# EAGLE board pannelized_v0_5 (EAGLE 7.2.0), part 1 of 2
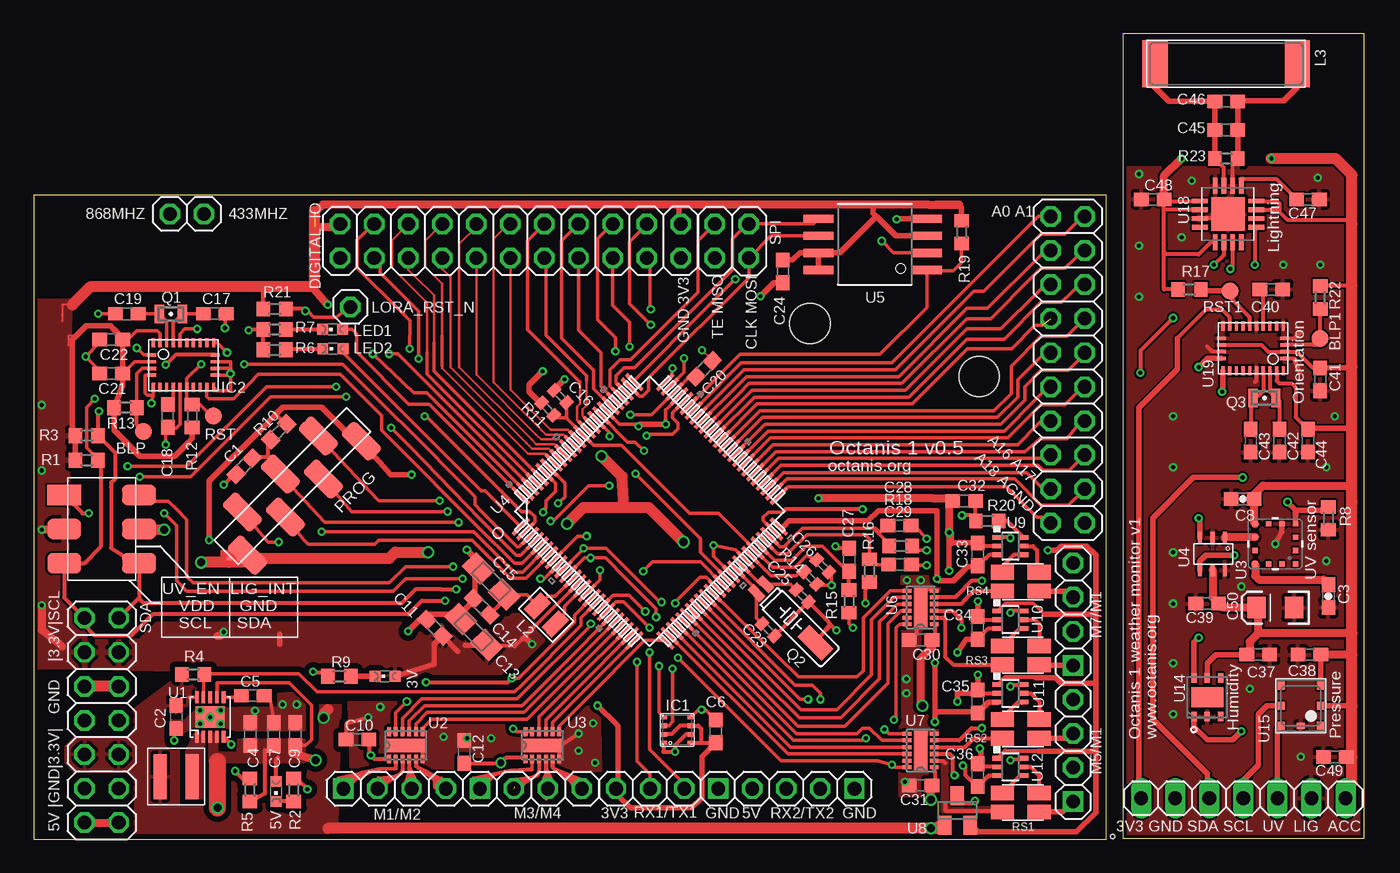
[diagram p0: board, top side]
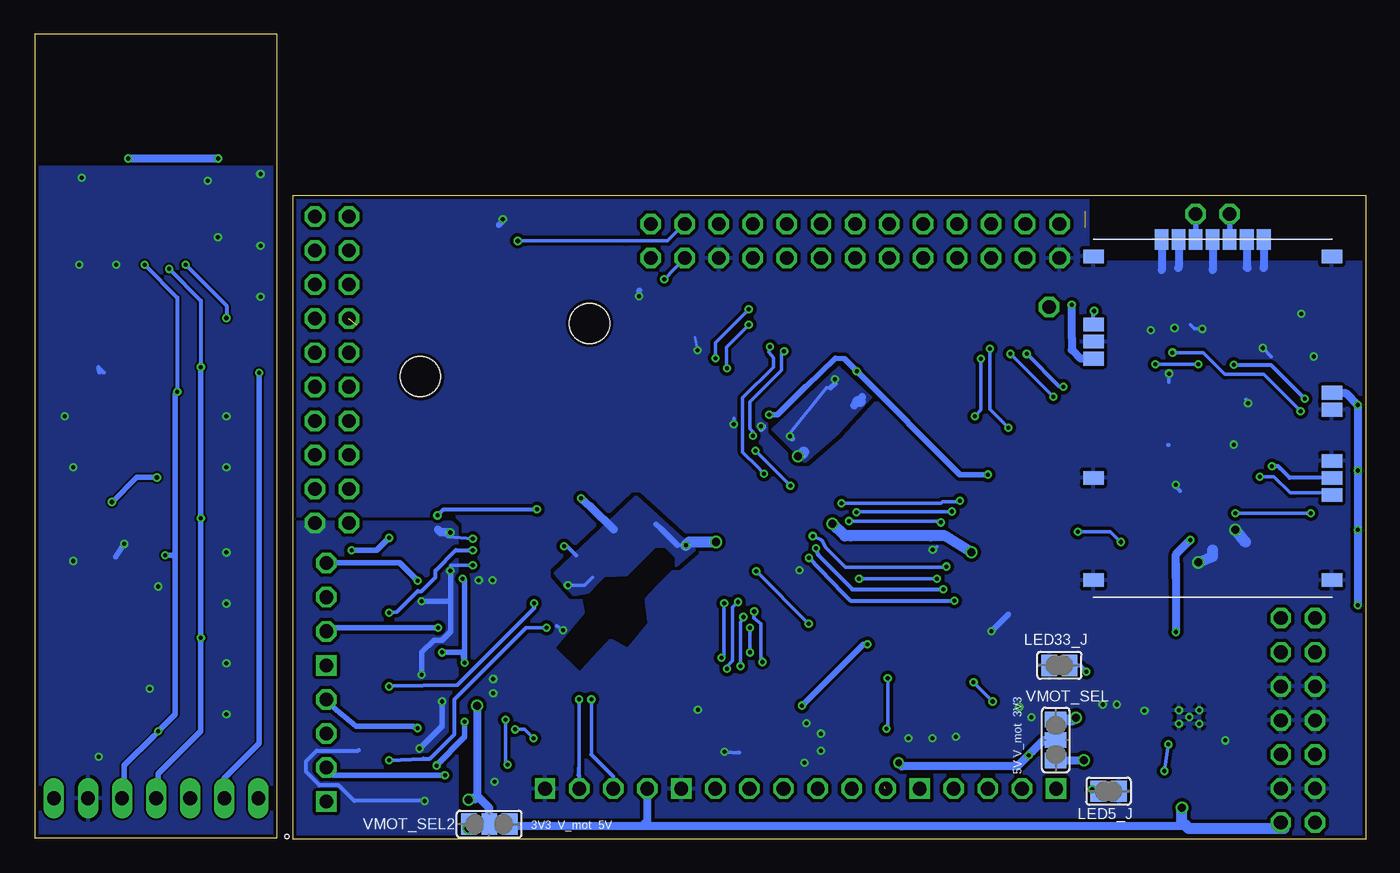
[diagram p1: board, bottom side, seen from below]

Size 99.21 x 60.07 mm. Coordinates in mm from the lower left corner, seen from the top.
Outline: 0,0 80,0 80,48 0,48 0,0
Outline: 99.21,0.07 99.21,60.07 81.21,60.07 81.21,0.07 99.21,0.07
Copper layers (1*16): Top 0.035mm / dielectric 1.5mm / Bottom 0.035mm
Design rules "SeeedStudio_2layer_DRU_no_angle_20140221 *": minimum track width 8mil, minimum drill 12mil, track to track 6mil, track to pad 8mil, pad to pad 6mil, via to via 8mil, smd to smd 0mil, copper to edge 10mil, drill to drill 10mil, minimum pad ring 6mil, minimum via ring 6mil, stop-mask expansion 2mil, vias tented up to drill 100mil, thermal gap 10mil
Net classes: 0 default: width 0.203 mm; 1 power: width 0.203 mm, drill 0.305 mm, clearance 0.152 mm; 2 VIN: width 0.203 mm, drill 0.305 mm, clearance 0.152 mm; 3 fine: width 0.406 mm, drill 0.61 mm, clearance 0.152 mm
Holes 3 mm at 57.9,38.46 70.5,34.5
Holes 0.3 mm at 80.47,0.22

## Footprints (pad centres in the part's own frame; a part is rotated, then mirrored left to right if it is on the bottom)
CHIPLED_0603 = smd 0.8 x 0.8: A 0,-0.75; C 0,0.75
1X01 = drill 1.016 octagon: 1 0,0
2X10 = drill 1.016 octagon: 1 -11.43,-1.27; 2 -11.43,1.27; 3 -8.89,-1.27; 4 -8.89,1.27; 5 -6.35,-1.27; 6 -6.35,1.27; 7 -3.81,-1.27; 8 -3.81,1.27; 9 -1.27,-1.27; 10 -1.27,1.27; 11 1.27,-1.27; 12 1.27,1.27; 13 3.81,-1.27; 14 3.81,1.27; 15 6.35,-1.27; 16 6.35,1.27; 17 8.89,-1.27; 18 8.89,1.27; 19 11.43,-1.27; 20 11.43,1.27
B1,27 = smd 1.27 x 1.27: TP 0,0
C0603 = smd 1.1 x 1: 1 -0.85,0; 2 0.85,0
0603-CAP = smd 1.1 x 1: 1 -0.85,0; 2 0.85,0
A/3216-18R = smd 1.95 x 1.5: + 1.375,0; - -1.375,0
C0402 = smd 0.7 x 0.9: 1 -0.65,0; 2 0.65,0
EIA3216 = smd 1.4 x 1.6: A 1.4,0; C -1.4,0
2X11 = drill 1.016 octagon: 1 -12.7,-1.27; 2 -12.7,1.27; 3 -10.16,-1.27; 4 -10.16,1.27; 5 -7.62,-1.27; 6 -7.62,1.27; 7 -5.08,-1.27; 8 -5.08,1.27; 9 -2.54,-1.27; 10 -2.54,1.27; 11 0,-1.27; 12 0,1.27; 13 2.54,-1.27; 14 2.54,1.27; 15 5.08,-1.27; 16 5.08,1.27; 17 7.62,-1.27; 18 7.62,1.27; 19 10.16,-1.27; 20 10.16,1.27; 21 12.7,-1.27; 22 12.7,1.27
BME280 = smd 0.35 x 0.5: 1 0.975,-1.025; 2 0.325,-1.025; 3 -0.325,-1.025; 4 -0.975,-1.025; 5 -0.975,1.025; 6 -0.325,1.025; 7 0.325,1.025; 8 0.975,1.025
BNO055 = smd 0.675 x 0.25: 1 1.663,2.25; 6 -1.665,2.25; 7 -1.665,1.75; 8 -1.665,1.25; 9 -1.665,0.75; 10 -1.665,0.25; 11 -1.665,-0.25; 12 -1.665,-0.75; 13 -1.665,-1.25; 14 -1.665,-1.75; 15 -1.665,-2.25; 20 1.663,-2.25; 21 1.663,-1.75; 22 1.663,-1.25; 23 1.663,-0.75; 24 1.663,-0.25; 25 1.663,0.25; 26 1.663,0.75; 27 1.663,1.25; 28 1.663,1.75 | smd 0.25 x 0.675: 2 0.75,2.362; 3 0.25,2.362; 4 -0.25,2.362; 5 -0.75,2.362; 16 -0.75,-2.362; 17 -0.25,-2.362; 18 0.25,-2.362; 19 0.75,-2.362
H2X3-SMD-2.54 = smd 2.54 x 1.524: 1 -2.794,2.54; 2 -2.794,0; 3 -2.794,-2.54; 4 2.794,-2.54; 5 2.794,0; 6 2.794,2.54
1X07 = drill 1.016 long: 1 -7.62,0; 2 -5.08,0; 3 -2.54,0; 4 0,0; 5 2.54,0; 6 5.08,0; 7 7.62,0
2X07 = drill 1.016 octagon: 1 -7.62,-1.27; 2 -7.62,1.27; 3 -5.08,-1.27; 4 -5.08,1.27; 5 -2.54,-1.27; 6 -2.54,1.27; 7 0,-1.27; 8 0,1.27; 9 2.54,-1.27; 10 2.54,1.27; 11 5.08,-1.27; 12 5.08,1.27; 13 7.62,-1.27; 14 7.62,1.27
XFL4020 = smd 0.965 x 3.353: P$1 -1.181,0; P$2 1.181,0
0806 = smd 1.1 x 1.8: 1 -0.94,0; 2 0.94,0
COILCRAFT = smd 1.9 x 3.5: 1 -5.3,0.05; 2 5.3,0.05
SJ = smd 1.168 x 1.6: 1 -0.762,0; 2 0.762,0
1X04-S = drill 1.016 square: 1 -3.81,0 | drill 1.016 octagon: 2 -1.27,0; 3 1.27,0; 4 3.81,0
1X7SMD = smd 3.048 x 1.524: 1 -1.27,6; 2 1.27,4; 3 -1.27,2; 4 1.27,0; 5 -1.27,-2; 6 1.27,-4; 7 -1.27,-6
FC-12M = smd 0.7 x 1.4: 1 -0.85,0; 2 0.85,0
MS3V-T1R = smd 0.635 x 1.27: P1 -0.47,-4.43; P2 0.47,-4.43 | smd 1.27 x 2.54: P3 0,1.3
R0603 = smd 1 x 1.1: 1 -0.85,0; 2 0.85,0
R0402 = smd 0.7 x 0.9: 1 -0.65,0; 2 0.65,0
4PADS_RESISTOR = smd 1.727 x 1.1: I1 0,0; I2 2.751,0; V1 0,1.4; V2 2.751,1.4
2X02 = drill 1.016 octagon: 1 -1.27,-1.27; 2 -1.27,1.27; 3 1.27,-1.27; 4 1.27,1.27
S-PVSON-N10 = smd 0.28 x 0.825: 1 -1,-1.462; 2 -0.5,-1.462; 3 0,-1.462; 4 0.5,-1.462; 5 1,-1.462; 6 1,1.462; 7 0.5,1.462; 8 0,1.462; 9 -0.5,1.462; 10 -1,1.462 | smd 2.15 x 1.6: EXPAD 0,0 | drill 0.3 pad 0.605: GND1 -0.762,0.508 | drill 0.3 pad 0.61: GND2 -0.762,-0.508; GND3 0,0; GND4 0.762,-0.508 | drill 0.305 pad 0.605: GND5 0.762,0.508
SON50P200X300X80-13N = smd 0.66 x 0.305: 1 -1.016,1.245; 2 -1.016,0.762; 3 -1.016,0.254; 4 -1.016,-0.254; 5 -1.016,-0.762; 6 -1.016,-1.245; 7 1.016,-1.245; 8 1.016,-0.762; 9 1.016,-0.254; 10 1.016,0.254; 11 1.016,0.762; 12 1.016,1.245 | smd 0.991 x 3.099: 13 0,0
PZ100 = smd 1.676 x 0.279: 1 -7.62,5.994; 2 -7.62,5.512; 3 -7.62,5.004; 4 -7.62,4.496; 5 -7.62,3.988; 6 -7.62,3.505; 7 -7.62,2.997; 8 -7.62,2.489; 9 -7.62,2.007; 10 -7.62,1.499; 11 -7.62,0.991; 12 -7.62,0.508; 13 -7.62,0; 14 -7.62,-0.508; 15 -7.62,-0.991; 16 -7.62,-1.499; 17 -7.62,-2.007; 18 -7.62,-2.489; 19 -7.62,-2.997; 20 -7.62,-3.505; 21 -7.62,-3.988; 22 -7.62,-4.496; 23 -7.62,-5.004; 24 -7.62,-5.512; 25 -7.62,-5.994; 51 7.62,-5.994; 52 7.62,-5.512; 53 7.62,-5.004; 54 7.62,-4.496; 55 7.62,-3.988; 56 7.62,-3.505; 57 7.62,-2.997; 58 7.62,-2.489; 59 7.62,-2.007; 60 7.62,-1.499; 61 7.62,-0.991; 62 7.62,-0.508; 63 7.62,0; 64 7.62,0.508; 65 7.62,0.991; 66 7.62,1.499; 67 7.62,2.007; 68 7.62,2.489; 69 7.62,2.997; 70 7.62,3.505; 71 7.62,3.988; 72 7.62,4.496; 73 7.62,5.004; 74 7.62,5.512; 75 7.62,5.994 | smd 0.279 x 1.676: 26 -5.994,-7.62; 27 -5.512,-7.62; 28 -5.004,-7.62; 29 -4.496,-7.62; 30 -3.988,-7.62; 31 -3.505,-7.62; 32 -2.997,-7.62; 33 -2.489,-7.62; 34 -2.007,-7.62; 35 -1.499,-7.62; 36 -0.991,-7.62; 37 -0.508,-7.62; 38 0,-7.62; 39 0.508,-7.62; 40 0.991,-7.62; 41 1.499,-7.62; 42 2.007,-7.62; 43 2.489,-7.62; 44 2.997,-7.62; 45 3.505,-7.62; 46 3.988,-7.62; 47 4.496,-7.62; 48 5.004,-7.62; 49 5.512,-7.62; 50 5.994,-7.62; 76 5.994,7.62; 77 5.512,7.62; 78 5.004,7.62; 79 4.496,7.62; 80 3.988,7.62; 81 3.505,7.62; 82 2.997,7.62; 83 2.489,7.62; 84 2.007,7.62; 85 1.499,7.62; 86 0.991,7.62; 87 0.508,7.62; 88 0,7.62; 89 -0.508,7.62; 90 -0.991,7.62; 91 -1.499,7.62; 92 -2.007,7.62; 93 -2.489,7.62; 94 -2.997,7.62; 95 -3.505,7.62; 96 -3.988,7.62; 97 -4.496,7.62; 98 -5.004,7.62; 99 -5.512,7.62; 100 -5.994,7.62
SOIC_8-LEAD = smd 0.61 x 2.21: CE -1.905,-2.934; RST/HOLD -0.635,5.156; SCK 0.635,5.156; SI 1.905,5.156; SO -0.635,-2.934; VDD -1.905,5.156; VSS 1.905,-2.934; WP 0.635,-2.934
MAX6001 = smd 1 x 1.4: 1 -0.95,-1.1; 2 0.95,-1.1; 3 0,1.1
SC70-6 = smd 0.35 x 0.8: 1 -0.65,-0.95; 2 0,-0.95; 3 0.65,-0.95; 4 0.65,0.95; 5 0,0.95; 6 -0.65,0.95
RN2483 = smd 1.524 x 1.016: P$1 17.78,1.27; P$6 17.78,7.62; P$7 17.78,8.89; P$8 17.78,10.16; P$11 17.78,13.97; P$12 17.78,15.24; P$20 17.78,25.4; P$28 0,25.4; P$32 0,20.32; P$33 0,19.05; P$34 0,17.78; P$41 0,8.89; P$47 0,1.27 | smd 1.016 x 1.524: P$21 12.7,26.67; P$22 11.43,26.67; P$23 10.16,26.67; P$24 8.89,26.67; P$25 7.62,26.67; P$26 6.35,26.67; P$27 5.08,26.67
DFN300X300X110-7N = smd 0.711 x 0.406: 1 -1.448,0.991; 2 -1.448,0; 3 -1.448,-0.991; 4 1.448,-0.991; 5 1.448,0; 6 1.448,0.991 | smd 1.499 x 2.388: 7 0,0
BMP180 = smd 0.6 x 0.5: 1 1.5,1.45; 2 0,1.45; 3 -1.5,1.45; 4 -1.5,-1.45; 5 0,-1.45; 6 1.5,-1.45 | smd 0.5 x 0.6: 7 1.5,0
SOT-23-6 = smd 0.305 x 0.9: SCL 2.45,-0.45; SDA 2.45,1.95; VDD 1.5,1.95; VIN+ 0.6,-0.45; VIN- 0.6,1.95; VSS 1.5,-0.45
ML8511 = smd 0.4 x 0.4: 1 1.5,-1.5; 2 1.5,-0.5; 3 1.5,0.5; 4 1.5,1.5; 5 0.5,1.5; 6 -0.5,1.5; 7 -1.5,1.5; 8 -1.5,0.5; 9 -1.5,-0.5; 10 -1.5,-1.5; 11 -0.5,-1.5; 12 0.5,-1.5
16LDMLPQ = smd 1.2 x 0.35: 1 -2.1,0.975; 2 -2.1,0.325; 3 -2.1,-0.325; 4 -2.1,-0.975; 9 2.1,-0.975; 10 2.1,-0.325; 11 2.1,0.325; 12 2.1,0.975 | smd 0.35 x 1.2: 5 -0.975,-2.1; 6 -0.325,-2.1; 7 0.325,-2.1; 8 0.975,-2.1; 13 0.975,2.1; 14 0.325,2.1; 15 -0.325,2.1; 16 -0.975,2.1 | smd 2.5 x 2.5: EXP 0,0
STAR = smd 0.152 x 0.305: AGND 0.635,-0.635; DGND 0.635,0.635 | smd 0.305 x 0.152: GND 0.635,0
SJ_2 = smd 1.168 x 1.6: 1 -1.524,0; 2 0,0; 3 1.524,0

## Placement (x,y rotation side)
3V  3V-ok  [CHIPLED_0603]  26.21,12.16 90 top
5V  5V-ok  [CHIPLED_0603]  18.08,3.57 180 top
433MHZ  [1X01]  12.7,46.62 0 top
868MHZ  [1X01]  10.16,46.62 0 top
ANALOG  [2X10]  77.11,35 270 top
BLP  PTR1B1,27  [B1,27]  8.21,30.4 180 top
BLP1  PTR1B1,27  [B1,27]  95.95,37.34 90 top
C1  1n  [C0603]  15.7,27.8 45 top
C2  22uF  [C0603]  10.64,9.12 270 top
C3  1n  [0603-CAP]  96.55,18.14 270 top
C4  22uF  [C0603]  16.17,7.85 90 top
C5  10nF  [C0603]  16.35,10.71 0 top
C6  100n  [C0603]  50.86,8.05 90 top
C7  22uF  [C0603]  17.93,7.85 90 top
C8  100n  [0603-CAP]  90.15,25.37 180 top
C9  3 x 22uF  [C0603]  19.53,7.85 90 top
C10  470n  [C0603]  24.16,7.44 0 top
C11  100n  [C0603]  29.9,15.77 315 top
C12  470n  [C0603]  32.13,6.52 270 top
C13  10u  [A/3216-18R]  32.82,15.46 315 top
C14  100n  [C0603]  33.4,17.34 315 top
C15  10u  [A/3216-18R]  34.11,19.22 315 top
C16  100n  [C0402]  39.28,33.03 135 top
C17  12p  [C0603]  13.51,39.18 0 top
C18  100n  [C0603]  10.01,31.56 90 top
C19  12p  [C0603]  6.96,39.18 180 top
C20  100n  [C0603]  50.01,35.09 225 top
C21  100n  [C0603]  5.79,34.72 180 top
C22  120n  [C0603]  5.79,37.26 180 top
C23  12p  [C0402]  54.79,15.62 135 top
C24  100n  [C0603]  55.88,42.34 270 top
C25  12p  [C0402]  57.33,18.16 135 top
C26  100n  [C0402]  58.86,20.37 315 top
C27  470n  [C0603]  60.81,20.84 270 top
C28  470n  [C0603]  64.57,23.38 180 top
C29  470n  [C0603]  64.62,20.49 180 top
C30  470n  [C0603]  66.14,14.85 0 top
C31  470n  [C0603]  66.14,4.03 0 top
C32  470n  [C0603]  69.39,25.21 0 top
C33  10n  [C0603]  70.41,21.25 270 top
C34  10n  [C0603]  70.41,15.76 270 top
C35  10n  [C0603]  70.41,10.28 270 top
C36  10n  [C0603]  70.41,4.79 270 top
C37  100n  [C0603]  91.32,13.77 0 top
C38  100n  [C0603]  95.13,13.77 180 top
C39  100n  [C0603]  87.51,17.58 180 top
C40  100n  [C0603]  92.29,41 180 top
C41  100n  [C0603]  95.95,34.29 270 top
C42  12p  [C0603]  92.9,29.72 270 top
C43  12p  [C0603]  90.76,29.72 270 top
C44  120n  [C0603]  95.03,29.72 270 top
C45  670p  [C0603]  88.93,52.88 0 top
C46  270p  [C0603]  88.93,55.02 0 top
C47  10u  [C0603]  95.03,47.7 180 top
C48  1u  [C0603]  83.45,47.7 0 top
C49  100n  [C0603]  97.04,6.15 180 top
C50  10uF  [EIA3216]  92.59,17.27 180 top
DIGITAL_IO  [2X11]  35.56,44.61 180 top
IC1  BME280  [BME280]  47.99,8.15 270 top
IC2  BNO055A  [BNO055]  11.18,35.36 90 top
J1  [H2X3-SMD-2.54]  5.08,23.13 0 top
JP1  [1X07]  90.21,3.07 180 top
JP2  [2X07]  5.08,8.87 270 top
L1  1uH  [XFL4020]  10.64,4.67 0 top
L2  4.7uH  [0806]  38.23,16.73 315 top
L3  100uH  [COILCRAFT]  88.93,57.76 0 top
LED1  LED0  [CHIPLED_0603]  22.3,38.02 90 top
LED2  LED1  [CHIPLED_0603]  22.33,36.57 90 top
LED5_J  [SJ]  19.19,3.59 180 bottom
LED33_J  [SJ]  22.86,12.97 0 bottom
LORA_RST_N  [1X01]  23.62,39.69 0 top
M1/M2  [1X04-S]  26.92,3.78 0 top
M3/M4  [1X04-S]  37.08,3.78 0 top
M5/M1  [1X04-S]  77.52,6.62 90 top
M7/M1  [1X04-S]  77.52,16.78 90 top
PROG  [1X7SMD]  19.3,26.33 135 top
Q1  32.768kHz  [FC-12M]  10.24,39.17 180 top
Q2  32.768kHz  [MS3V-T1R]  57.38,15.57 225 top
Q3  32.768kHz  [FC-12M]  91.78,32.9 0 top
R1  4.7k  [R0603]  3.96,28.26 180 top
R2  1k  [R0603]  19.41,3.67 270 top
R3  4.7k  [R0603]  3.96,30.09 180 top
R4  1M  [R0603]  11.91,12.29 180 top
R5  1M  [R0603]  16.14,3.68 270 top
R6  1k  [R0603]  17.98,36.49 0 top
R7  1k  [R0603]  17.98,38.01 0 top
R8  10k  [R0603]  96.55,23.93 270 top
R9  1k  [R0603]  22.81,12.16 0 top
R10  47k  [R0603]  18.29,30.39 225 top
R11  0R  [R0402]  38.33,32.08 135 top
R12  100k  [R0603]  11.84,31.56 90 top
R13  100k  [R0603]  6.86,32.18 180 top
R14  91k 0.1% ±25 ppm/°C  [R0402]  57.94,19.48 315 top
R15  6.8k  [R0603]  60.81,17.75 270 top
R16  6.8k  [R0603]  62.33,20.03 270 top
R17  10k  [R0603]  86.19,41 0 top
R18  6.8k  [R0603]  64.67,21.86 0 top
R19  10k  [R0603]  69.21,45.26 90 top
R20  6.8k  [R0603]  71.12,23.74 0 top
R21  100k  [R0603]  17.98,39.54 180 top
R22  10k  [R0603]  95.95,40.39 90 top
R23  10k  [R0603]  88.93,50.75 180 top
RS1  RS4  [4PADS_RESISTOR]  72.24,18.51 0 top
RS2  RS3  [4PADS_RESISTOR]  72.24,13.02 0 top
RS3  RS2  [4PADS_RESISTOR]  72.24,7.53 0 top
RS4  RS1  [4PADS_RESISTOR]  72.24,2.05 0 top
RST  PTR1B1,27  [B1,27]  13.41,31.57 180 top
RST1  PTR1B1,27  [B1,27]  89.22,40.88 90 top
RX1/TX1  [1X04-S]  47.24,3.78 180 top
RX2/TX2  [1X04-S]  57.4,3.78 180 top
SPI  [2X02]  52.07,44.61 0 top
U1  TPS61232  [S-PVSON-N10]  13.18,9.12 0 top
U2  DRV8836DSSR  [SON50P200X300X80-13N]  27.76,7.01 90 top
U3  DRV8836DSSR  [SON50P200X300X80-13N]  37.95,7.01 90 top
U4  MSP432  [PZ100]  45.95,24.45 45 top
U5  SST25VF064C  [SOIC_8-LEAD]  63.68,44.35 90 top
U6  DRV8836DSSR  [SON50P200X300X80-13N]  66.14,17.29 180 top
U7  DRV8836DSSR  [SON50P200X300X80-13N]  66.14,6.62 180 top
U8  MAX6001SOT-23  [MAX6001]  68.88,2.15 0 top
U9  INA210  [SC70-6]  72.85,21.86 270 top
U10  INA210  [SC70-6]  72.85,16.37 270 top
U11  INA210  [SC70-6]  72.85,10.89 270 top
U12  INA210  [SC70-6]  72.85,5.4 270 top
U13  RN2483  [RN2483]  20.32,18.05 0 bottom
U14  SHT21  [DFN300X300X110-7N]  87.51,10.59 90 top
U15  BMP180  [BMP180]  94.5,9.96 270 top
U16  MCP3425  [SOT-23-6]  89.42,22.02 180 top
U17  ML8511-UV-SENSORSMD  [ML8511]  92.59,22.02 0 top
U18  AS3935  [16LDMLPQ]  89.08,46.61 270 top
U19  BNO055A  [BNO055]  90.94,36.6 270 top
U$1  WEATHER_STRIP_DOCU  [WEATHER_STRIP_DOCU]  14.63,16.98 0 top
U$100  STARGND  [STAR]  15.21,21.55 270 top
VMOT_SEL  3V3 V_Motor 5V  [SJ_2]  23.14,7.41 270 bottom
VMOT_SEL2  3V3 V_Motor 5V  [SJ_2]  65.38,1.13 0 bottom

## Library data of the parts
3V 5V LED1 LED2 = adafruit
433MHZ 868MHZ LORA_RST_N PROG = Headerlibrary
ANALOG DIGITAL_IO JP1 JP2 SPI = pinhead
BLP BLP1 RST RST1 = testpad
C1 C2 C4-C7 C9-C49 R1-R7 R9-R22 = rcl
C3 = SparkFun-Capacitors; PROD_ID: CAP-07886
C8 = SparkFun-Capacitors; PROD_ID: CAP-00810
C50 = SparkFun-Retired; PROD_ID: CAP-00811
IC1 = bosch-bme280
IC2 U19 = BNO055
J1 = Seeed-OPL-Connector; MPN: F185-1203A1BMYA1
L1 = Coilcraft; URL: http://www.coilcraft.com/xfl4020.cfm
L2 = Murata
L3 U18 = AS3935
LED5_J LED33_J VMOT_SEL VMOT_SEL2 = jumper
M1/M2 M3/M4 M5/M1 M7/M1 RX1/TX1 RX2/TX2 = pinhead-2
Q1 Q3 = crystal; URL: http://www.mouser.ch/ProductDetail/ECS/ECS-327-125-12-TR/?qs=sGAEpiMZZMsBj6bBr9Q9adKxTNdvE4KvM1b8HDkgjuY%3d
Q2 = microcrystal
R8 R23 = resistor
RS1-RS4 U9-U12 = Octanis1_EPS
U1 = texasinstruments
U2 U3 U6 U7 = DRV8834; MPN: DRV8836DSSR; OC_FARNELL: 2115236; OC_NEWARK: 94T6066; PACKAGE: SON-12; SUPPLIER: TEXAS INSTRUMENTS
U4 = MSP-EXP432
U5 = BertaLib
U8 U13 U$1 = Octanis1
U14 = SENSIRION-SHT21; MPN: SHT21; OC_FARNELL: 1855468; OC_NEWARK: 20T1172; PACKAGE: DFN-6; SUPPLIER: SENSIRION
U15 = SparkFun-Sensors
U16 = phMeter
U17 = SparkFun-Sensors; PROD_ID: IC-11927
U$100 = lpatiny

## Nets
3V3_MODULE2 [power]: C2.1 JP2.9 JP2.10 L1.P$1 R4.2 U1.10 U8.1 VMOT_SEL2.1 VMOT_SEL.1
5VEN: R4.1 U1.9 U4.17
+3V1 [power]: C8.1 C37.1 C38.1 C39.1 C41.1 C44.1 C48.2 C49.1 C50.A JP1.1 R17.1 R22.2 U14.5 U15.2 U15.3 U16.VDD U17.7 U18.5 U18.6 U18.9 U18.15 U18.16 U19.3 U19.17 U19.28
+3V3 [power]: 3V.A C6.1 C11.2 C13.+ C20.2 C21.1 C22.1 C24.1 DIGITAL_IO.1 DIGITAL_IO.21 IC1.2 IC1.6 IC1.8 IC2.3 IC2.28 J1.2 JP2.3 JP2.4 PROG.7 R1.2 R3.2 R10.1 R11.2 R12.1 R13.2 R19.2 R21.2 RX1/TX1.4 U4.13 U4.73 U5.RST/HOLD U5.VDD U5.WP U13.P$12 U13.P$34
+5V [fine]: 5V.A C4.1 C7.1 C9.1 JP2.13 JP2.14 R5.2 RX2/TX2.4 U1.3 U1.4 U1.7 VMOT_SEL2.3 VMOT_SEL.3
A0: ANALOG.1 U4.69
A1: ANALOG.2 U4.68
A2: ANALOG.3 U4.67
A3: ANALOG.4 U4.66
A4: ANALOG.5 U4.65
A5: ANALOG.6 U4.64
A6: ANALOG.7 U4.63
A7: ANALOG.8 U4.62
A8: ANALOG.9 U4.61
A9: ANALOG.10 U4.60
A10: ANALOG.11 U4.59
A11: ANALOG.12 U4.58
A12: ANALOG.13 U4.57
A13: ANALOG.14 U4.56
A14: ANALOG.15 U4.55
A15: ANALOG.16 U4.54
A16: ANALOG.17 U4.53
A17: ANALOG.18 U4.52
A18: ANALOG.19 U4.51
A20: C32.2 R20.1 U4.49
A20UNF: R20.2 U9.6
A21: C28.2 R18.1 U4.48
A21UNF: R18.2 U10.6
A22: C29.2 R16.1 U4.47
A22UNF: R16.2 U11.6
A23: C27.2 R15.1 U4.46
A23UNF: R15.2 U12.6
ACCEL_INT: IC2.14 U4.5
ACCEL_IRQ: JP1.7 U19.14
ACCEL_N_BOOTLD: BLP.TP IC2.4 R13.1
ACCEL_N_BOOTLD1: BLP1.TP R22.1 U19.4
ACCEL_N_RST: IC2.11 R12.2 RST.TP U4.3
ACCEL_N_RST1: R17.2 RST1.TP U19.11
AGND [power]: ANALOG.20 C16.2 C26.2 C27.1 C28.1 C29.1 C32.1 C33.1 C34.1 C35.1 C36.1 R14.2 U4.40 U4.43 U4.84 U8.3 U9.2 U10.2 U11.2 U12.2 U$100.AGND
ANT433: 433MHZ.1 U13.P$25
ANT868: 868MHZ.1 U13.P$23
AVCC [VIN]: C16.1 C26.1 R11.1 U4.45 U4.87
CURR_SENSE_EN [VIN]: C33.2 C34.2 C35.2 C36.2 U4.50 U9.3 U10.3 U11.3 U12.3
EXT_LIGHTNING_INT: J1.6 U4.8
EXT_UV_EN: J1.1 U4.9
GND [power]: C1.1 C2.2 C4.2 C5.2 C6.2 C7.2 C9.2 C10.1 C11.1 C12.1 C13.- C14.1 C15.- C17.2 C18.1 C19.2 C20.1 C21.2 C22.2 C23.1 C24.2 C25.1 C30.1 C31.1 DIGITAL_IO.2 DIGITAL_IO.22 IC1.1 IC1.5 IC1.7 IC2.2 IC2.5 IC2.6 IC2.10 IC2.15 IC2.16 IC2.17 IC2.18 IC2.25 J1.5 JP2.5 JP2.6 JP2.7 JP2.8 JP2.11 JP2.12 LED5_J.1 LED33_J.1 PROG.1 Q2.P3 R6.1 R7.1 RX1/TX1.1 RX2/TX2.1 U1.EXPAD U1.GND1 U1.GND2 U1.GND3 U1.GND4 U1.GND5 U2.6 U2.13 U3.6 U3.13 U4.15 U4.72 U4.82 U5.VSS U6.6 U6.13 U7.6 U7.13 U13.P$1 U13.P$8 U13.P$11 U13.P$20 U13.P$21 U13.P$22 U13.P$24 U13.P$26 U13.P$27 U13.P$28 U13.P$33 U13.P$41 U13.P$47 U$100.DGND U$100.GND
GND1: C3.2 C8.2 C37.2 C38.2 C39.2 C40.1 C41.2 C42.2 C43.2 C44.2 C45.2 C46.2 C47.1 C48.1 C49.2 C50.C JP1.2 L3.2 R8.2 R23.1 U14.2 U15.7 U16.VIN- U16.VSS U17.5 U18.2 U18.4 U18.7 U18.EXP U19.2 U19.5 U19.6 U19.10 U19.15 U19.16 U19.18 U19.25
IND: L1.P$2 U1.1 U1.2
LED0: LED1.A U4.100
LED1: LED2.A U4.1
LIGHTNING_IRQ: JP1.6 U18.10
LORA_RST_N: LORA_RST_N.1 R21.1 U13.P$32
M1IN1: U2.10 U4.38
M1IN2: U2.9 U4.20
M2IN1: U2.8 U4.21
M2IN2: U2.7 U4.22
M3IN1: U3.10 U4.23
M3IN2: U3.9 U4.24
M4IN1: U3.8 U4.25
M4IN2: U3.7 U4.26
M5IN1: U4.27 U7.10
M5IN2: U4.28 U7.9
M5OUT1: RS4.I1 U7.2
M6IN1: U4.30 U7.8
M6IN2: U4.29 U7.7
M7IN1: U4.31 U6.10
M7IN2: U4.32 U6.9
M8IN1: U4.33 U6.8
M8IN2: U4.36 U6.7
M1234SLEEP: U2.11 U2.12 U3.11 U3.12 U4.16
M5678SLEEP: U4.37 U6.11 U6.12 U7.11 U7.12
N$1: C14.2 C15.+ L2.1 U4.12
N$2: R5.1 U1.5
N$4: 3V.C R9.2
N$5: LED1.C R7.2
N$6: LED2.C R6.2
N$8: C23.2 Q2.P2 U4.41
N$10: C25.2 Q2.P1 U4.42
N$13: M3/M4.1 U3.2
N$14: LED5_J.2 R2.1
N$15: RS4.V2 U12.5
N$17: RS4.V1 U12.4
N$18: C18.2 IC2.9
N$19: C19.1 IC2.27 Q1.2
N$20: C3.1 U17.10
N$21: M5/M1.1 RS4.I2
N$22: U16.VIN+ U17.8
N$23: RS3.V1 U11.4
N$24: RS3.V2 U11.5
N$25: RS3.I1 U7.4
N$26: LED33_J.2 R9.1
N$27: M5/M1.3 RS3.I2
N$28: RS2.V2 U10.5
N$29: RS2.V1 U10.4
N$30: RS1.V2 U9.5
N$31: RS1.V1 U9.4
N$32: M7/M1.1 RS2.I2
N$33: R14.1 U4.44
N$34: L2.2 U4.14
N$35: RS1.I1 U6.4
N$36: RS2.I1 U6.2
N$37: M7/M1.3 RS1.I2
N$38: M5/M1.2 U7.3
N$39: M3/M4.2 U3.3
N$40: M3/M4.3 U3.4
N$41: M3/M4.4 U3.5
N$42: C5.1 U1.6
N$43: M5/M1.4 U7.5
N$44: 5V.C R2.2
N$45: M7/M1.4 U6.5
N$46: C45.1 C46.1 L3.1 R23.2 U18.3
N$47: C47.2 U18.1
N$48: C40.2 U19.9
N$49: M1/M2.1 U2.2
N$50: M1/M2.2 U2.3
N$51: M1/M2.3 U2.4
N$52: M1/M2.4 U2.5
N$53: C43.1 Q3.1 U19.26
N$54: M7/M1.2 U6.3
N$55: C42.1 Q3.2 U19.27
N$73: C17.1 IC2.26 Q1.1
N$76: PROG.6 U4.94
N$77: PROG.5 U4.95
P1.0: DIGITAL_IO.19 U4.4
P3.7: DIGITAL_IO.6 U4.39
P5.7 [power]: DIGITAL_IO.5 U4.71
P6.6: DIGITAL_IO.8 U4.80
P6.7: DIGITAL_IO.7 U4.81
P7.0: DIGITAL_IO.12 U4.88
P7.1: DIGITAL_IO.11 U4.89
P7.2: DIGITAL_IO.14 U4.90
P7.3: DIGITAL_IO.13 U4.91
P9.2: DIGITAL_IO.4 U4.74
P9.3: DIGITAL_IO.3 U4.75
P9.4: DIGITAL_IO.18 U4.96
P9.5: DIGITAL_IO.17 U4.97
P10.2: DIGITAL_IO.20 U4.2
PJ.2: DIGITAL_IO.10 U4.85
PJ.3: DIGITAL_IO.9 U4.86
PJ.4: DIGITAL_IO.16 U4.92
PJ.5: DIGITAL_IO.15 U4.93
RST_N: C1.2 PROG.4 R10.2 U4.83
RX0: PROG.2 U4.6
RX1: RX1/TX1.3 U4.18
RX2: RX2/TX2.3 U4.34
RX3: U4.98 U13.P$6
SCL: IC1.4 IC2.19 J1.3 JP2.1 R1.1 U4.11
SCL1: JP1.4 U14.6 U15.5 U16.SCL U18.11 U19.19
SDA: IC1.3 IC2.20 J1.4 JP2.2 R3.1 U4.10
SDA1: JP1.3 U14.1 U15.6 U16.SDA U18.13 U19.20
SPI_EXTSLAVE_TE: SPI.1 U4.76
SPI_FLASH_CS: R19.1 U4.70 U5.CE
SPI_MISO: SPI.2 U4.79 U5.SO
SPI_MOSI: SPI.4 U4.78 U5.SI
SPI_SCK: SPI.3 U4.77 U5.SCK
TX0: PROG.3 U4.7
TX1: RX1/TX1.2 U4.19
TX2: RX2/TX2.2 U4.35
TX3: U4.99 U13.P$7
UV_EN: JP1.5 R8.1 U17.4
V_MOTOR [fine]: C10.2 C12.2 U2.1 U3.1 VMOT_SEL.2
V_MOTOR2 [fine]: C30.2 C31.2 U6.1 U7.1 VMOT_SEL2.2
VREF_M [power]: U8.2 U9.1 U10.1 U11.1 U12.1